# Altium PCB MotorCtrl.PcbDoc
Units mil, origin at the board's own origin, x right, y up, seen from the top; angles counter-clockwise.
Board outline 6000 x 4000 mil, 2 copper layers (Top Layer, Bottom Layer); 16 components, 30 nets, 72 pads, 0 vias.
Unrouted connection lines stored in the file: 9.
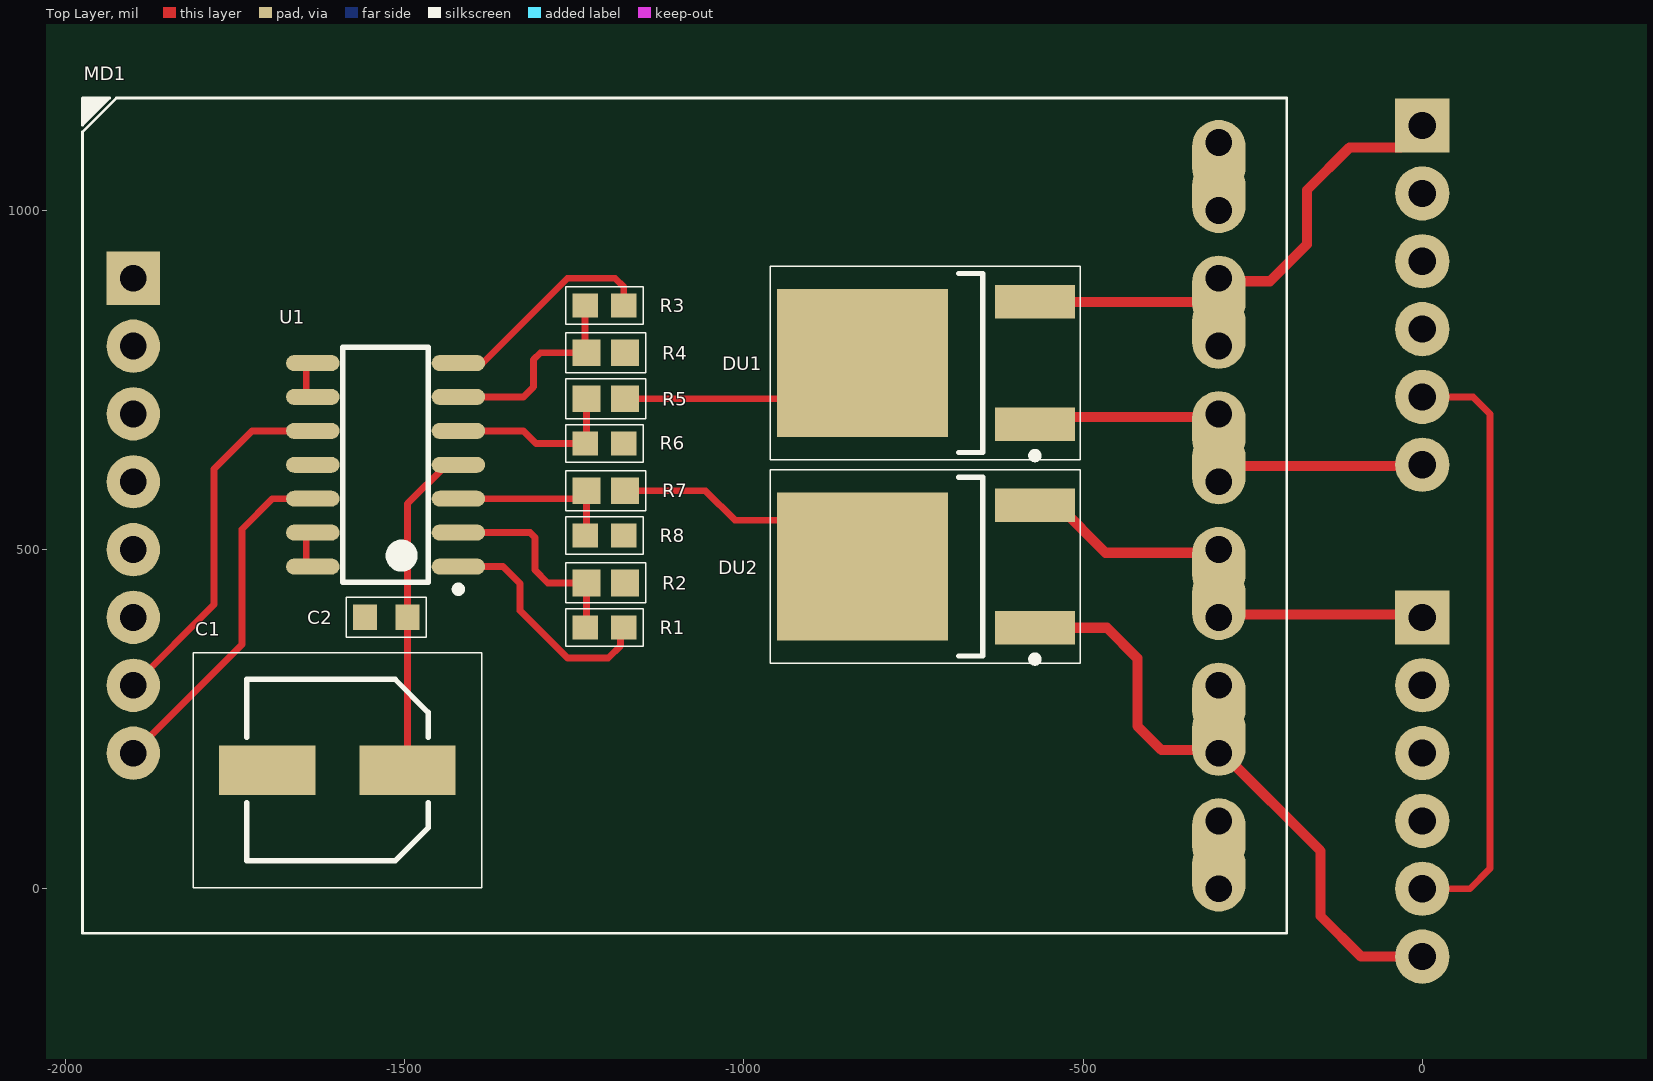
[diagram p0: Top Layer view]
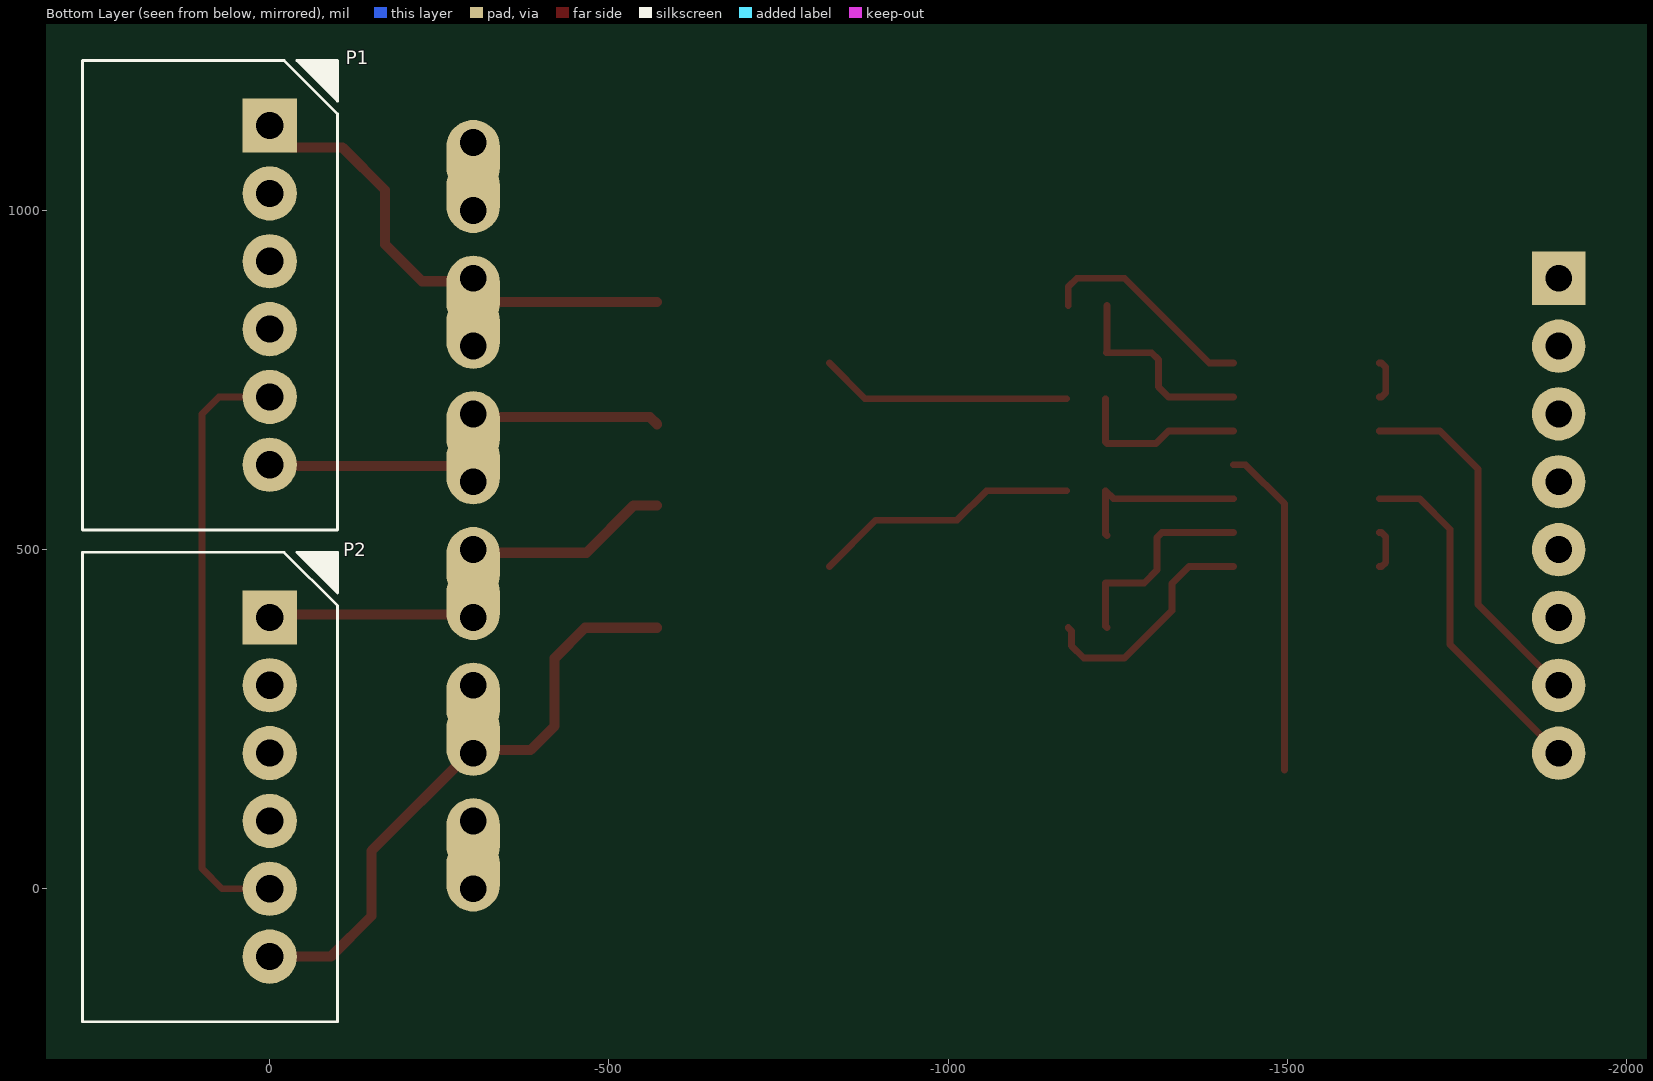
[diagram p1: Bottom Layer view, seen from below]
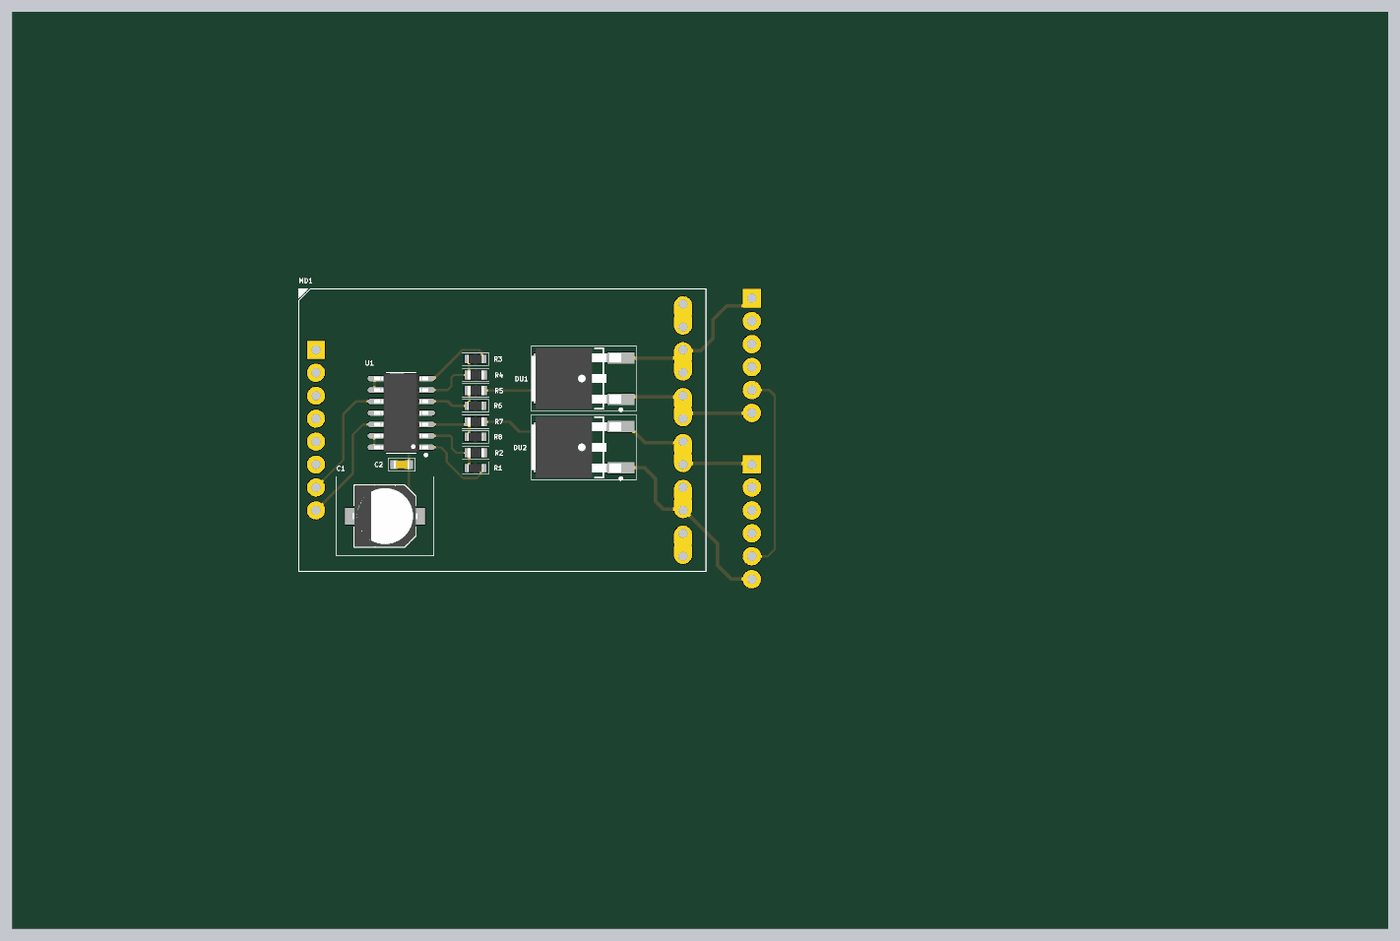
[diagram p2: 3D render of the assembled board from above, using the file's embedded part models]

## Layer stack, top to bottom
Top Solder: solder mask 0.4, Solder Resist, Dk 3.5
Top Layer: signal copper 1.4
Dielectric 1: dielectric 12.6, FR-4, Dk 4.8
Bottom Layer: signal copper 1.4
Bottom Solder: solder mask 0.4, Solder Resist, Dk 3.5

## Board outline
-3225,-1625 2775,-1625 2775,2375 -3225,2375

## Design rules (kind name [scope] priority, off if disabled: settings)
Clearance "Schematic Clearance Constraint" [InNetClass('motor_out')] p1: gap=25.59 ignorepadtopadclearanceinfootprint=TRUE except(0: Arc-Hole Track-Hole SMDPad-Hole THPad-Hole Via-Hole Fill-Hole Poly-Hole Region-Hole Text-Hole)
Clearance [All] p2: gap=5.12 ignorepadtopadclearanceinfootprint=TRUE
PolygonConnect [All] p1: connectstyle=Relief reliefconductorwidth=10 reliefentries=4 polygonreliefangle="90 Angle" airgapwidth=10
RoutingVias "Schematic Routing Via Style" [InNetClass('motor_out')] p1: holewidth=10 width=20 viastyle="Through Hole" minholewidth=10 minwidth=20 maxholewidth=15 maxwidth=30
RoutingVias [All] p2: holewidth=28 width=50 viastyle="Through Hole" minholewidth=28 minwidth=50 maxholewidth=28 maxwidth=50
SolderMaskExpansion [All] p1: expansion=4 istentingtop=FALSE
Width "Schematic Width Constraint" [InNetClass('motor_out')] p1: maxlimit=15 minlimit=10 preferedwidth=15
Width [All] p2: maxlimit=10 minlimit=10 preferedwidth=10
30 further rules are at their usual default settings.

## Classes and differential pairs
net class motor_out: MA1 MA2 MB1 MB2
component class MotorCtrl: C1 DU1 DU2 MD1 P1 P2 R R3 R4 R6 U1

## Components (designator, comment, footprint, x,y, rotation, side; value= is the part's Value field where it differs from the comment)
C1 "25V 220uF" VZT221M1ETR-0607 -1599.21,175 r180 top value=1000uF
C2 "50V 0.1uF" 0603F104M500NT -1527.36,400 r0 top value=1uF
DU1 "MBRD1035CTLT4G" MBRD1035CTLT4G -732.48,775 r180 top
DU2 "MBRD1035CTLT4G" MBRD1035CTLT4G -732.48,475 r180 top
MD1 "MD02" MOTOR_DRIVER -1975,1165.75 r0 top locked
P1 "MA_Pin" S6B-XH-A -100,1221 r270 bottom
P2 "MB_Pin" S6B-XH-A -100,496 r270 bottom
R1 "0603 1/10W 3.3k" 0603WAF3301T5E -1205.51,385 r0 top
R2 "0603 1/10W 12k" PTFR0603B12K0N9 -1203.54,450.89 r180 top
R3 "0603 1/10W 3.3k" 0603WAF3301T5E -1205.51,860 r0 top
R4 "0603 1/10W 12k" PTFR0603B12K0N9 -1203.54,790.17 r180 top
R5 "0603 1/10W 12k" PTFR0603B12K0N9 -1203.54,722.32 r180 top
R6 "0603 1/10W 3.3k" 0603WAF3301T5E -1205.51,656.43 r0 top
R7 "0603 1/10W 12k" PTFR0603B12K0N9 -1203.54,586.6 r180 top
R8 "0603 1/10W 3.3k" 0603WAF3301T5E -1205.51,520.71 r0 top
U1 "OPA4277UA" OPA4277UA -1528.15,625 r180 top

## Footprints (in the part's own frame and the unit in brackets; to place one, negate y for a bottom-side part, rotate by r counter-clockwise, add the part's x,y. Pads: shape width x height; smd on the part's side, far side on the other; paste and mask are expansions set on the pad)
0603F104M500NT [mm] "0603 50V 0.1uF SMD MLCC"
  rect 0.9x0.95 smd: 1(-0.8,0) 2(0.8,0)
  silkscreen extent -1.5,-0.75 1.5,0.75, body extent -0.85,-0.45 0.85,0.45, height 0.9
0603WAF3301T5E [mm] "0603 SMD 3.3k 1% Res"
  rect 0.95x0.9 smd: 1(-0.725,0) 2(0.725,0)
  silkscreen extent -1.45,-0.7 1.45,0.7, body extent -0.85,-0.45 0.85,0.45, height 0.55
MBRD1035CTLT4G [mm] "35V 5A 2Channel Diode IC"
  rect 3x1.25 smd: 1(-4.1,2.29) 3(-4.1,-2.29)
  rect 6.4x5.55 smd: 4(2.35,0)
  silkscreen extent -5.8,-3.63 5.8,3.63, body extent -4.14,-3.37 5.77,3.38, height 2.51
MOTOR_DRIVER [mm] "MD02_17A_Motor_Driver"
  rect 2x2 hole 1: 1(1.905,-6.75)
  round 2 hole 1: 2(1.905,-9.29) 3(1.905,-11.83) 4(1.905,-14.37) 5(1.905,-16.91) 6(1.905,-19.45) 7(1.905,-21.99) 8(1.905,-24.53)
  oval 2x2.8 hole 1 copper offset 0,0.55: 9(42.545,-4.21) 10(42.545,-9.29) 11(42.545,-14.37) 12(42.545,-19.45) 13(42.545,-24.53) 14(42.545,-29.61)
  oval 2x2.8 hole 1 copper offset 0,-0.55: 9(42.545,-1.67) 10(42.545,-6.75) 11(42.545,-11.83) 12(42.545,-16.91) 13(42.545,-21.99) 14(42.545,-27.07)
  silkscreen extent 0,-31.28 45.09,0, body extent 0.64,-31.28 43.82,0, height 9.1
OPA4277UA [mm] "SOIC, 14-Leads, Body 8.65x3.90mm, Pitch 1.27mm, IPC Medium Density"
  oval 2x0.6 smd: 1(-2.725,3.81) 2(-2.725,2.54) 3(-2.725,1.27) 4(-2.725,0) 5(-2.725,-1.27) 6(-2.725,-2.54) 7(-2.725,-3.81) 8(2.725,-3.81) 9(2.725,-2.54) 10(2.725,-1.27) 11(2.725,0) 12(2.725,1.27) 13(2.725,2.54) 14(2.725,3.81)
  silkscreen extent -2.85,-4.4 1.6,4.78, body extent -3,-4.4 3,4.4, height 1.75
PTFR0603B12K0N9 [mm] "0603 SMD 12k 0.1% Res"
  rect 1.05x1 smd: 1(-0.725,0) 2(0.725,0)
  silkscreen extent -1.5,-0.75 1.5,0.75, body extent -0.9,-0.5 0.9,0.5, height 0.5
S6B-XH-A [mil] "XH Header-side 6P"
  rect 80x80 hole 40: 1(96,-100)
  round 80 hole 40: 2(196,-100) 3(296,-100) 4(396,-100) 5(496,-100) 6(596,-100)
  silkscreen extent 0,-376 692,0
VZT221M1ETR-0607 [mm] "SMD 6.3x7.7mm 220uF 25V Capacitor"
  rect 3.6x1.85 smd: 1(-2.625,0) 2(2.625,0)
  silkscreen extent -5.4,-4.4 5.4,4.4, body extent -3.6,-3.4 3.6,3.4, height 8

## Part data
C1: library part "Cap Pol1", "-45℃~+105℃ 2000hrs@105℃ 220uF 7.7mm 25V 6.3mm ±20% SMD,6.3x7.7mm Aluminum Electrolytic Capacitors - SMD ROHS", ComponentLink1Description=buy_link, ComponentLink1URL=https://shopee.tw/(%E5%85%83%E8%80%80)-%E7%9B%B4%E6%8F%92-%E9%9B%BB%E8%A7%A3%E9%9B%BB%E5%AE%B9-47uF~1000uF-16V~50V-%E9%AB%94%E7%A9%8D-8*14.5mm~10*19.5mm(5%E9%A1%86%E4%B8%80%E6%A8%99)-i.140576581.2524079905?sp_atk=ccd45567-e386-4bfb-a6e8-2480335a57a5, LatestRevisionDate=17-Jul-2002, LatestRevisionNote="Re-released for DXP Platform.", PackageDescription="Polarized Capacitor (Radial); 2 Leads", PackageReference=RB7.6-15, Published=8-Jun-2000, Publisher="Altium Limited"
C2: library part "Cap Semi", "50V 100nF Y5V ±20% 0603 Multilayer Ceramic Capacitors MLCC - SMD/SMT ROHS", LatestRevisionDate=29-May-2009, LatestRevisionNote="IPC-7351 Footprint Added.", PackageDescription="Chip Capacitor", PackageReference=C1206, Published=8-Jun-2000, Publisher="Altium Limited"
DU1 DU2: "35V 470mV@5A 5A TO-252-2(DPAK) Schottky Barrier Diodes (SBD) ROHS", buy_link=https://www.ruten.com.tw/item/show?21744290003226, datasheet=https://datasheet.ciiva.com/905/mbrd1035ctl-d-905952.pdf?src-supplier=Digi-Key
MD1: library part "Motor Driver", "17A 2 Cheel Motor Driver", buy_link=https://www.ruten.com.tw/item/show?21811773783671
P1 P2: library part "Header 6", "S6B-XH-A", LatestRevisionDate=17-Jul-2002, LatestRevisionNote="Re-released for DXP Platform.", Publisher="Altium Limited"
R1 R3 R6 R8: library part Res1, "±1% 1/10W Thick Film Resistors 75V ±100ppm/℃ -55℃~+155℃ 3.3kΩ 0603 Chip Resistor - Surface Mount ROHS", LatestRevisionDate=17-Jul-2002, LatestRevisionNote="Re-released for DXP Platform.", PackageDescription="Axial Device, Thru-Hole; 2 Leads; 0.3 in Pin Spacing", PackageReference=AXIAL-0.3, Published=8-Jun-2000, Publisher="Altium Limited"
R2 R4 R5 R7: library part Res1, "±0.1% 100mW Thin Film Resistor 100V ±10ppm/℃ 12kΩ -55℃~+125℃ 0603 Chip Resistor - Surface Mount ROHS", LatestRevisionDate=17-Jul-2002, LatestRevisionNote="Re-released for DXP Platform.", PackageDescription="Axial Device, Thru-Hole; 2 Leads; 0.3 in Pin Spacing", PackageReference=AXIAL-0.3, Published=8-Jun-2000, Publisher="Altium Limited"
U1: library part "Small Signal Amplifier", "Small Signal Amplifier", buy_link=https://www.ruten.com.tw/item/show?22015419000992, datasheet=https://datasheet.ciiva.com/27050/905643-27050822.pdf?src-supplier=Jameco

## Nets (pads, with @x,y where several pads share a name; then routed paths per layer and width w, separated by ;. In a path a pad name is that pad's centre, name@x,y a point inside that pad or via, vN(x,y) a via of type N, cw(c..) or ccw(c..) an arc to the next point about the centre after c; other vN are vias at no path point)
3P3: P1.5 P2.5 | length 892.8
  Top Layer w10: P2.5 70,0 100,30 100,700 75,725 P1.5
A_12V: MD1.9
A_GND: MD1.14
CSA_Origin: MD1.7 U1.10 | length 537.1
  Top Layer w10: MD1.7 -1781.14,418.86 -1781.14,618.86 -1725,675 U1.10
CSB_Origin: MD1.8 U1.12 | length 519.5
  Top Layer w10: MD1.8 -1740,360 -1740,530 -1695,575 U1.12
D_5V: C1.1 C2.2 U1.4 | length 491.4
  Top Layer w10: C1.1 C2.2 -1495.87,567.72 -1438.58,625 U1.4
D_GND: C1.2 C2.1 MD1.1 P1.2 P2.2 R2.1 R4.1 R6.2 R8.2 U1.11
Drive_EN: MD1.6
MA1: DU1.3 MD1.10 P1.1 | length 732.5
  Top Layer w15: DU1.3 -329.44,865.16 -300,894.6 -300,900 -295.45,895.46 -224.54,895.46 -170,950 -170,1030 -107.5,1092.5 -32.5,1092.5 P1.1
MA2: DU1.1 MD1.11 P1.6 | length 587.7
  Top Layer w15: DU1.1 -560.45,695.46 -304.54,695.46 MD1.11@-300,700 ; MD1.11@-300,600 -276.67,623.33 -1.67,623.33 P1.6
MA_DIR: MD1.2
MA_phaseA: P1.3
MA_phaseB: P1.4
MA_PWM: MD1.3
MB1: DU2.3 MD1.12 P2.1 | length 605.6
  Top Layer w15: DU2.3 -536.61,565.16 -466.91,495.46 -304.54,495.46 MD1.12@-300,500 ; MD1.12@-300,400 -295.45,404.55 -4.55,404.55 P2.1
MB2: DU2.1 MD1.13 P2.6 | length 886.7
  Top Layer w15: DU2.1 -464.84,384.84 -420,340 -420,240 -384.55,204.55 -304.55,204.55 -300,200 -294.09,200 -150,55.91 -150,-40 -90,-100 P2.6
MB_DIR: MD1.4
MB_phaseA: P2.3
MB_phaseB: P2.4
MB_PWM: MD1.5
OPA_A+: R7.2 R8.1 U1.3 | length 260.3
  Top Layer w10: U1.3 -1243.69,575 R7.2 -1232.09,522.68 R8.1
OPA_A-: R1.1 R2.2 U1.2 | length 314.4
  Top Layer w10: U1.2 -1315,525 -1307.94,517.94 -1307.94,469.72 -1289.11,450.89 R2.2 -1232.09,386.97 R1.1
OPA_AO: R1.2 U1.1 | length 354.8
  Top Layer w10: U1.1 -1355,475 -1330,450 -1330,410 -1260,340 -1200,340 -1181.86,358.14 -1181.86,380.11 R1.2
OPA_B+: R5.2 R6.1 U1.5 | length 261.2
  Top Layer w10: U1.5 -1325,675 -1306.43,656.43 R6.1 -1232.09,658.4 R5.2
OPA_B-: R3.1 R4.2 U1.6 | length 308.5
  Top Layer w10: U1.6 -1325,725 -1310,740 -1310,780 -1299.83,790.17 -1233.07,790.17 -1234.06,791.16 R3.1
OPA_BO: R3.2 U1.7 | length 328
  Top Layer w10: U1.7 -1385,775 -1260,900 -1190,900 -1176.97,886.97 R3.2
OPA_CO: U1.8 U1.9 | length 62.3
  Top Layer w10: U1.9 -1638.98,725 -1645.28,731.29 -1645.28,768.71 -1638.98,775 U1.8
OPA_DO: U1.13 U1.14 | length 62.3
  Top Layer w10: U1.14 -1638.98,475 -1645.28,481.29 -1645.28,518.71 -1638.98,525 U1.13
VSA_Origin: DU1.4 R5.1 | length 371.8
  Top Layer w10: R5.1 -877.68,722.32 DU1.4
VSB_Origin: DU2.4 R7.1 | length 396.2
  Top Layer w10: R7.1 -1056.6,586.6 -1013.33,543.33 -893.33,543.33 DU2.4